# EAGLE board scHnRk_1 (EAGLE 7.5.0)
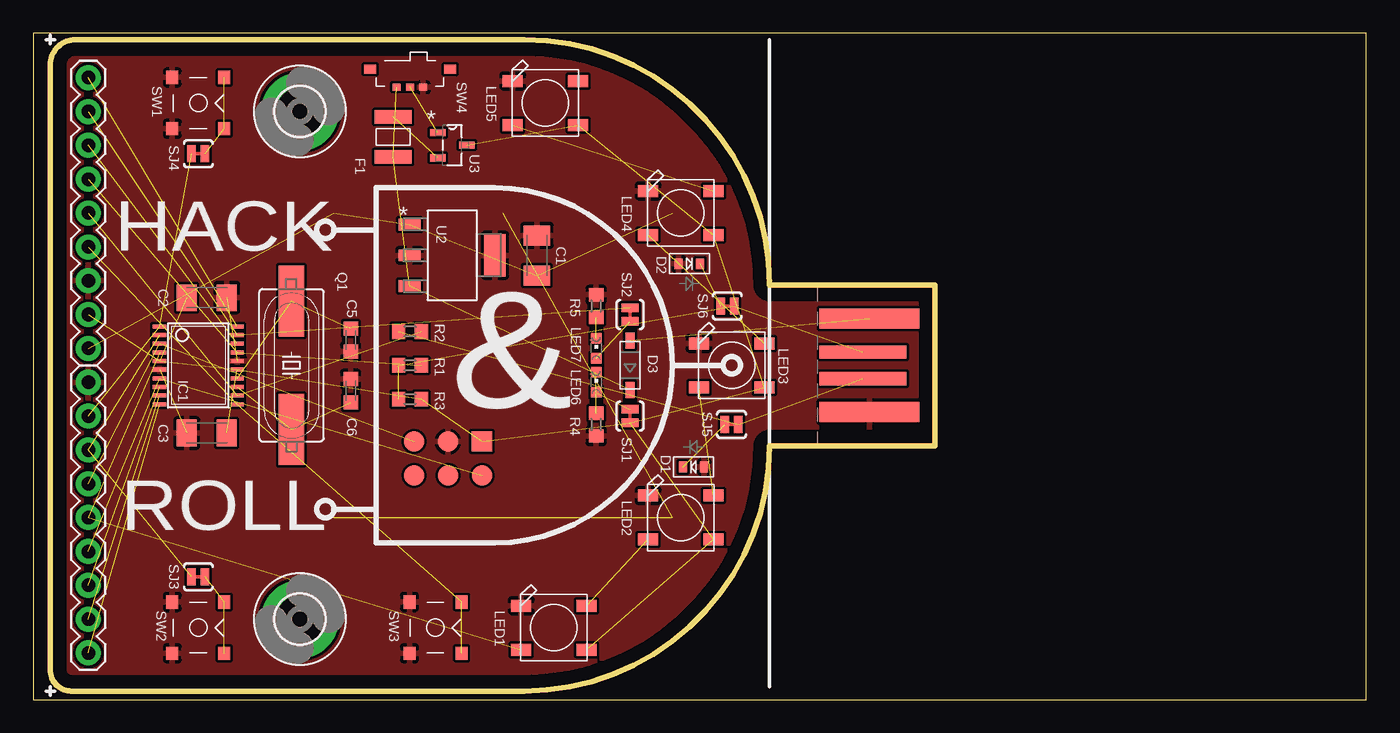
[diagram p0: board, top side]
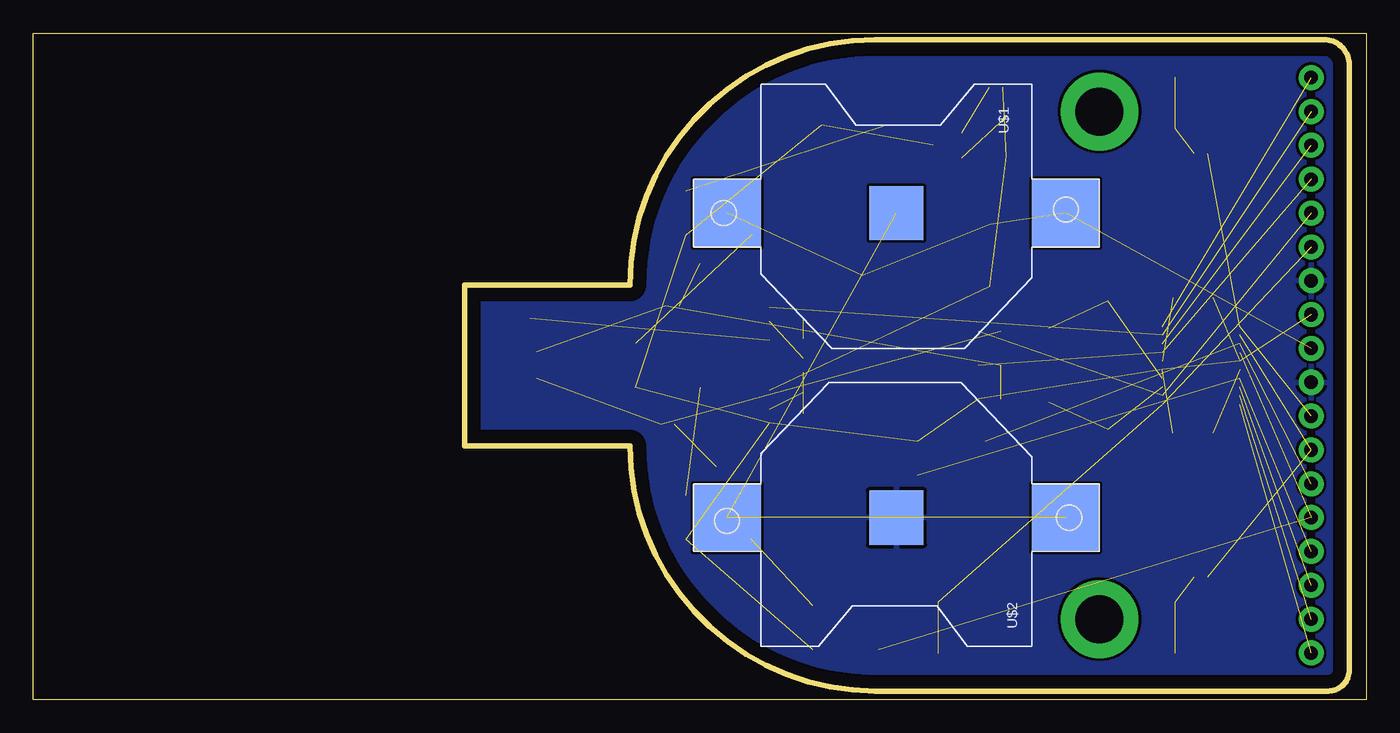
[diagram p1: board, bottom side, seen from below]

Size 100 x 50 mm. Coordinates in mm from the lower left corner, seen from the top.
Outline: 0,0 100,0 100,50 0,50 0,0
Outline: 3.17,49.53 arc90 1.27,47.62 1.27,2.22 arc90 2.86,0.64 36.83,0.64 arc90 55.24,19.05 67.63,19.05 67.63,31.11 55.24,31.11 arc90 36.83,49.53 3.17,49.53
Copper layers (1*16): Top 0.035mm / dielectric 1.5mm / Bottom 0.035mm
Design rules "default": minimum track width 10mil, minimum drill 24mil, track to track 8mil, track to pad 8mil, pad to pad 8mil, via to via 8mil, smd to smd 8mil, copper to edge 40mil, drill to drill 8mil, minimum pad ring 10mil, minimum via ring 8mil, stop-mask expansion 4mil, vias tented up to drill 0mil, thermal gap 10mil

## Footprints (pad centres in the part's own frame; a part is rotated, then mirrored left to right if it is on the bottom)
C1206K = smd 1.5 x 2: 1 -1.5,0; 2 1.5,0
C0603K = smd 1.05 x 1.08: 1 -0.875,0; 2 0.875,0
SOD-523 = smd 0.8 x 0.6: A 0,-0.8; K 0,0.8
SOD-123 = smd 1.2 x 0.7: A 1.85,0; C -1.85,0
MC36214 = smd 1 x 2.8: P$1 -1.5,0; P$2 1.5,0
3,6-PAD = drill 3.6 pad 5.842: B3,6 0,0
TSSOP20 = smd 0.305 x 0.991: 1 -2.925,-2.918; 2 -2.275,-2.918; 3 -1.625,-2.918; 4 -0.975,-2.918; 5 -0.325,-2.918; 6 0.325,-2.918; 7 0.975,-2.918; 8 1.625,-2.918; 9 2.275,-2.918; 10 2.925,-2.918; 11 2.925,2.918; 12 2.275,2.918; 13 1.625,2.918; 14 0.975,2.918; 15 0.325,2.918; 16 -0.325,2.918; 17 -0.975,2.918; 18 -1.625,2.918; 19 -2.275,2.918; 20 -2.925,2.918
USB-A-PCB = smd 7.5 x 1.5: 5V -0.2,-3.5; GND -0.2,3.5 | smd 6.5 x 1: USB_M 0.3,-1; USB_P 0.3,1
1X09 = drill 1.016 pad 1.88: 1 0,0; 2 2.54,0; 3 5.08,0; 4 7.62,0; 5 10.16,0; 6 12.7,0; 7 15.24,0; 8 17.78,0; 9 20.32,0
WS2812B = smd 1.5 x 0.9: 1-VDD 2.45,-1.65; 2-DOUT 2.45,1.65; 3-GND -2.45,1.65; 4-DIN -2.45,-1.65
CHIPLED_0603 = smd 0.8 x 0.8: A 0,-0.75; C 0,0.75
HC49UP = smd 5.334 x 1.93: 1 -4.826,0; 2 4.826,0
R0603 = smd 1 x 1.1: 1 -0.85,0; 2 0.85,0
PAD-JUMPER-2-NC_BY_TRACE_YES_SILK = smd 0.635 x 1.27: 1 -0.508,0; 2 0.508,0
SKRBAGE010 = smd 1 x 0.9: P$1 -1.925,1.95; P$2 -1.925,-1.95; P$3 1.925,1.95; P$4 1.925,-1.95
SSAJ120100 = smd 0.6 x 0.51: P$1 -1,1.36; P$2 1,1.36; P$C 0,1.36 | smd 0.9 x 0.7: P$3 -3,0; P$4 3,0
TP-R = smd 1.524 x 1.524: P$1 0,0
TP_S = smd 1.524 x 1.524: P$1 0,0
SOT230P700X180-4N = smd 1.626 x 0.889: 1 -3.2,2.311; 2 -3.2,0; 3 -3.2,-2.311 | smd 1.626 x 3.175: 4 3.2,0
SOT95P230X110-3N = smd 1.168 x 0.533: 1 -1.092,0.94; 2 -1.092,-0.94; 3 1.092,0
CR2032-SMD = smd 5.08 x 5.08: +$1 -12.7,0; +$2 12.7,0 | smd 4.064 x 4.064: - 0,0

## Placement (x,y rotation side)
C1  10uF  [C1206K]  37.78,33.34 90 top
C2  10uF  [C1206K]  13.02,30.16 0 top
C3  10uF, AVCC  [C1206K]  13.02,20 180 top
C5  18pF  [C0603K]  23.81,26.99 270 top
C6  18pF  [C0603K]  23.81,23.18 90 top
D1  3.6 Zener  [SOD-523]  49.53,17.46 90 top
D2  3.6 Zener  [SOD-523]  49.21,32.7 270 top
D3  B0520LW-7-F  [SOD-123]  44.77,25.08 90 top
F1  MC36214  [MC36214]  26.99,42.23 90 top
H1  MOUNT-PAD-ROUND3.6  [3,6-PAD]  20,44.13 0 top
H2  MOUNT-PAD-ROUND3.6  [3,6-PAD]  20,6.03 0 top
IC1  ATTINY87/167AUTOMOTIVETSSOP  [TSSOP20]  12.38,25.08 270 top
JP1  USBPCB  [USB-A-PCB]  62.55,25.08 180 top
JP2  [1X09]  4.13,3.49 90 top
JP4  [1X09]  4.13,26.35 90 top
LED1  WS2812B5050  [WS2812B]  39.05,5.4 0 top
LED2  WS2812B5050  [WS2812B]  48.58,13.65 0 top
LED3  WS2812B5050  [WS2812B]  52.39,25.08 0 top
LED4  WS2812B5050  [WS2812B]  48.58,36.51 0 top
LED5  WS2812B5050  [WS2812B]  38.42,44.77 0 top
LED6  PWR  [CHIPLED_0603]  42.23,23.81 0 top
LED7  D1  [CHIPLED_0603]  42.23,26.35 0 top
Q1  16MHz  [HC49UP]  19.37,25.08 270 top
R1  66.5  [R0603]  28.26,25.08 0 top
R2  66.5  [R0603]  28.26,27.62 0 top
R3  1K5  [R0603]  28.26,22.54 0 top
R4  180R  [R0603]  42.23,20.64 90 top
R5  180R  [R0603]  42.23,29.53 270 top
SJ1  JUMPER  [PAD-JUMPER-2-NC_BY_TRACE_YES_SILK]  44.77,21.27 270 top
SJ2  JUMPER  [PAD-JUMPER-2-NC_BY_TRACE_YES_SILK]  44.77,28.89 90 top
SJ3  JUMPER  [PAD-JUMPER-2-NC_BY_TRACE_YES_SILK]  12.38,9.21 0 top
SJ4  JUMPER  [PAD-JUMPER-2-NC_BY_TRACE_YES_SILK]  12.38,40.96 0 top
SJ5  JUMPER  [PAD-JUMPER-2-NC_BY_TRACE_YES_SILK]  52.39,20.64 0 top
SJ6  JUMPER  [PAD-JUMPER-2-NC_BY_TRACE_YES_SILK]  52.07,29.53 0 top
SW1  L_BUTTON  [SKRBAGE010]  12.38,44.77 270 top
SW2  R_BUTTON  [SKRBAGE010]  12.38,5.4 270 top
SW3  RESET  [SKRBAGE010]  30.16,5.4 270 top
SW4  SSAJ120100  [SSAJ120100]  28.26,47.31 180 top
TP1  TP-R  [TP-R]  31.11,19.37 90 top
TP2  TP-S  [TP_S]  33.66,19.37 90 top
TP3  TP-R  [TP-R]  28.57,19.37 90 top
TP4  TP-R  [TP-R]  33.66,16.83 90 top
TP5  TP-R  [TP-R]  31.11,16.83 90 top
TP6  TP-R  [TP-R]  28.57,16.83 90 top
U2  MCP1825S-5002E/DB  [SOT230P700X180-4N]  31.43,33.34 0 top
U3  PMV32UP  [SOT95P230X110-3N]  31.43,41.59 0 top
U$1  [CR2032-SMD]  35.24,36.51 0 bottom
U$2  [CR2032-SMD]  35.24,13.65 180 bottom

## Library data of the parts
C1-C3 C5 C6 D1-D3 LED1-LED7 R1-R5 U$1 U$2 = adafruit
F1 SW1-SW4 TP1-TP6 = scHnRk
H1 H2 = holes
IC1 = attiny87_167_automotive
JP1 JP2 JP4 = SparkFun-Connectors
Q1 = adafruit; OC_FARNELL: unknown; OC_NEWARK: unknown
SJ1-SJ6 = SparkFun-Passives
U2 = Microchip_By_element14_Batch_1; MPN: MCP1825S-5002E/DB; OC_FARNELL: 1578407; OC_NEWARK: 26M9964; PACKAGE: SOT-223-3; SUPPLIER: Microchip
U3 = NXP_By_element14_Batch_1; MPN: PMV32UP; OC_FARNELL: 1894624; OC_NEWARK: 47T2356; PACKAGE: SOT-3; SUPPLIER: NXP Semiconductors

## Nets
5V: C2.1 C3.1 IC1.5 IC1.15 JP4.2 LED1.1-VDD LED2.1-VDD LED3.1-VDD LED4.1-VDD LED5.1-VDD R3.2 SJ1.2 TP2.P$1 U3.3
D0/SCA: IC1.20 JP4.9
D1/LED: IC1.19 JP4.8 SJ2.2
D2/SCL: IC1.18 JP4.7
D3: IC1.17 JP4.6 R1.2
D4/A4: IC1.12 JP4.5 R2.2
D6/A6: IC1.1 JP2.8 SJ4.1
D7/A7: IC1.2 JP2.7 SJ3.1
D8/A8/MISO: IC1.3 JP2.6 TP3.P$1
D9/A9: IC1.4 JP2.5 LED1.4-DIN
D10/A10/MOSI: IC1.7 JP2.4 TP4.P$1
D11/A11/SCK: IC1.8 JP2.3
D12/A12/SS: IC1.9 JP2.2
D13/A13: IC1.10 JP2.1
GND: C1.2 C2.2 C3.2 C5.2 C6.2 D1.A D2.A IC1.6 IC1.16 JP1.GND JP2.9 JP4.3 LED1.3-GND LED2.3-GND LED3.3-GND LED4.3-GND LED5.3-GND R4.1 R5.1 SW1.P$2 SW1.P$4 SW2.P$2 SW2.P$4 SW3.P$2 SW3.P$4 SW4.P$1 TP1.P$1 U2.2 U2.4 U$2.-
N$1: U$1.- U$2.+$1 U$2.+$2
N$2: SJ4.2 SW1.P$1 SW1.P$3
N$3: LED1.2-DOUT LED2.4-DIN
N$4: LED2.2-DOUT LED3.4-DIN
N$5: LED3.2-DOUT LED4.4-DIN
N$6: LED4.2-DOUT LED5.4-DIN
N$7: SW4.P$C U3.1
N$8: SJ3.2 SW2.P$1 SW2.P$3
N$9: D1.K SJ5.1
N$10: D2.K SJ6.1
N$15: JP1.USB_M R1.1 R3.1 SJ6.2
N$16: JP1.USB_P R2.1 SJ5.2
N$17: TP5.P$1
N$18: TP6.P$1
N$22: F1.P$2 U3.2
N$28: LED6.C R4.2
N$29: LED7.C R5.2
N$31: LED6.A SJ1.1
N$34: LED7.A SJ2.1
PRE5V: D3.C F1.P$1 SW4.P$2 U2.3
RESET: IC1.11 JP4.4 SW3.P$1 SW3.P$3
USBVCC: D3.A JP1.5V
VBATT: C1.1 JP4.1 U2.1 U$1.+$1 U$1.+$2
XTAL1: C5.1 IC1.14 Q1.1
XTAL2: C6.1 IC1.13 Q1.2

## Tracks (layer width: path | path; a pad name or v marks a point on that pad's centre or on a via)
5V  (13 unrouted)
D0/SCA  (1 unrouted)
D1/LED  (2 unrouted)
D2/SCL  (1 unrouted)
D3  (2 unrouted)
D4/A4  (2 unrouted)
D6/A6  (2 unrouted)
D7/A7  (2 unrouted)
D8/A8/MISO  (2 unrouted)
D9/A9  (2 unrouted)
D10/A10/MOSI  (2 unrouted)
D11/A11/SCK  (1 unrouted)
D12/A12/SS  (1 unrouted)
D13/A13  (1 unrouted)
GND  (2 unrouted)
  pour Top: 55.24,31.11 arc90 36.83,49.53 3.17,49.53 arc90 1.27,47.62 1.27,2.22 arc90 2.86,0.64 36.51,0.64 36.83,0.64 arc90 55.24,19.05 67.63,19.05 67.63,31.11
  pour Bottom: 55.24,31.11 arc90 36.83,49.53 3.17,49.53 arc90 1.27,47.62 1.27,2.22 arc90 2.86,0.64 36.83,0.64 arc90 55.24,19.05 67.63,19.05 67.63,31.11
N$1  (2 unrouted)
N$2  (2 unrouted)
N$3  (1 unrouted)
N$4  (1 unrouted)
N$5  (1 unrouted)
N$6  (1 unrouted)
N$7  (1 unrouted)
N$8  (2 unrouted)
N$9  (1 unrouted)
N$10  (1 unrouted)
N$15  (3 unrouted)
N$16  (2 unrouted)
N$22  (1 unrouted)
N$28  (1 unrouted)
N$29  (1 unrouted)
N$31  (1 unrouted)
N$34  (1 unrouted)
PRE5V  (3 unrouted)
RESET  (3 unrouted)
USBVCC  (1 unrouted)
VBATT  (4 unrouted)
XTAL1  (2 unrouted)
XTAL2  (2 unrouted)

## Text on the board
tNames: HACK | & | ROLL